# Altium PCB RobotCtrl_Base_Func.PcbDoc
Units mil, origin at the board's own origin, x right, y up, seen from the top; angles counter-clockwise.
Board outline 3937.01 x 3937.01 mil, 2 copper layers (Top Layer, Bottom Layer); 88 components, 151 nets, 416 pads, 115 vias.
Unrouted connection lines stored in the file: 1.
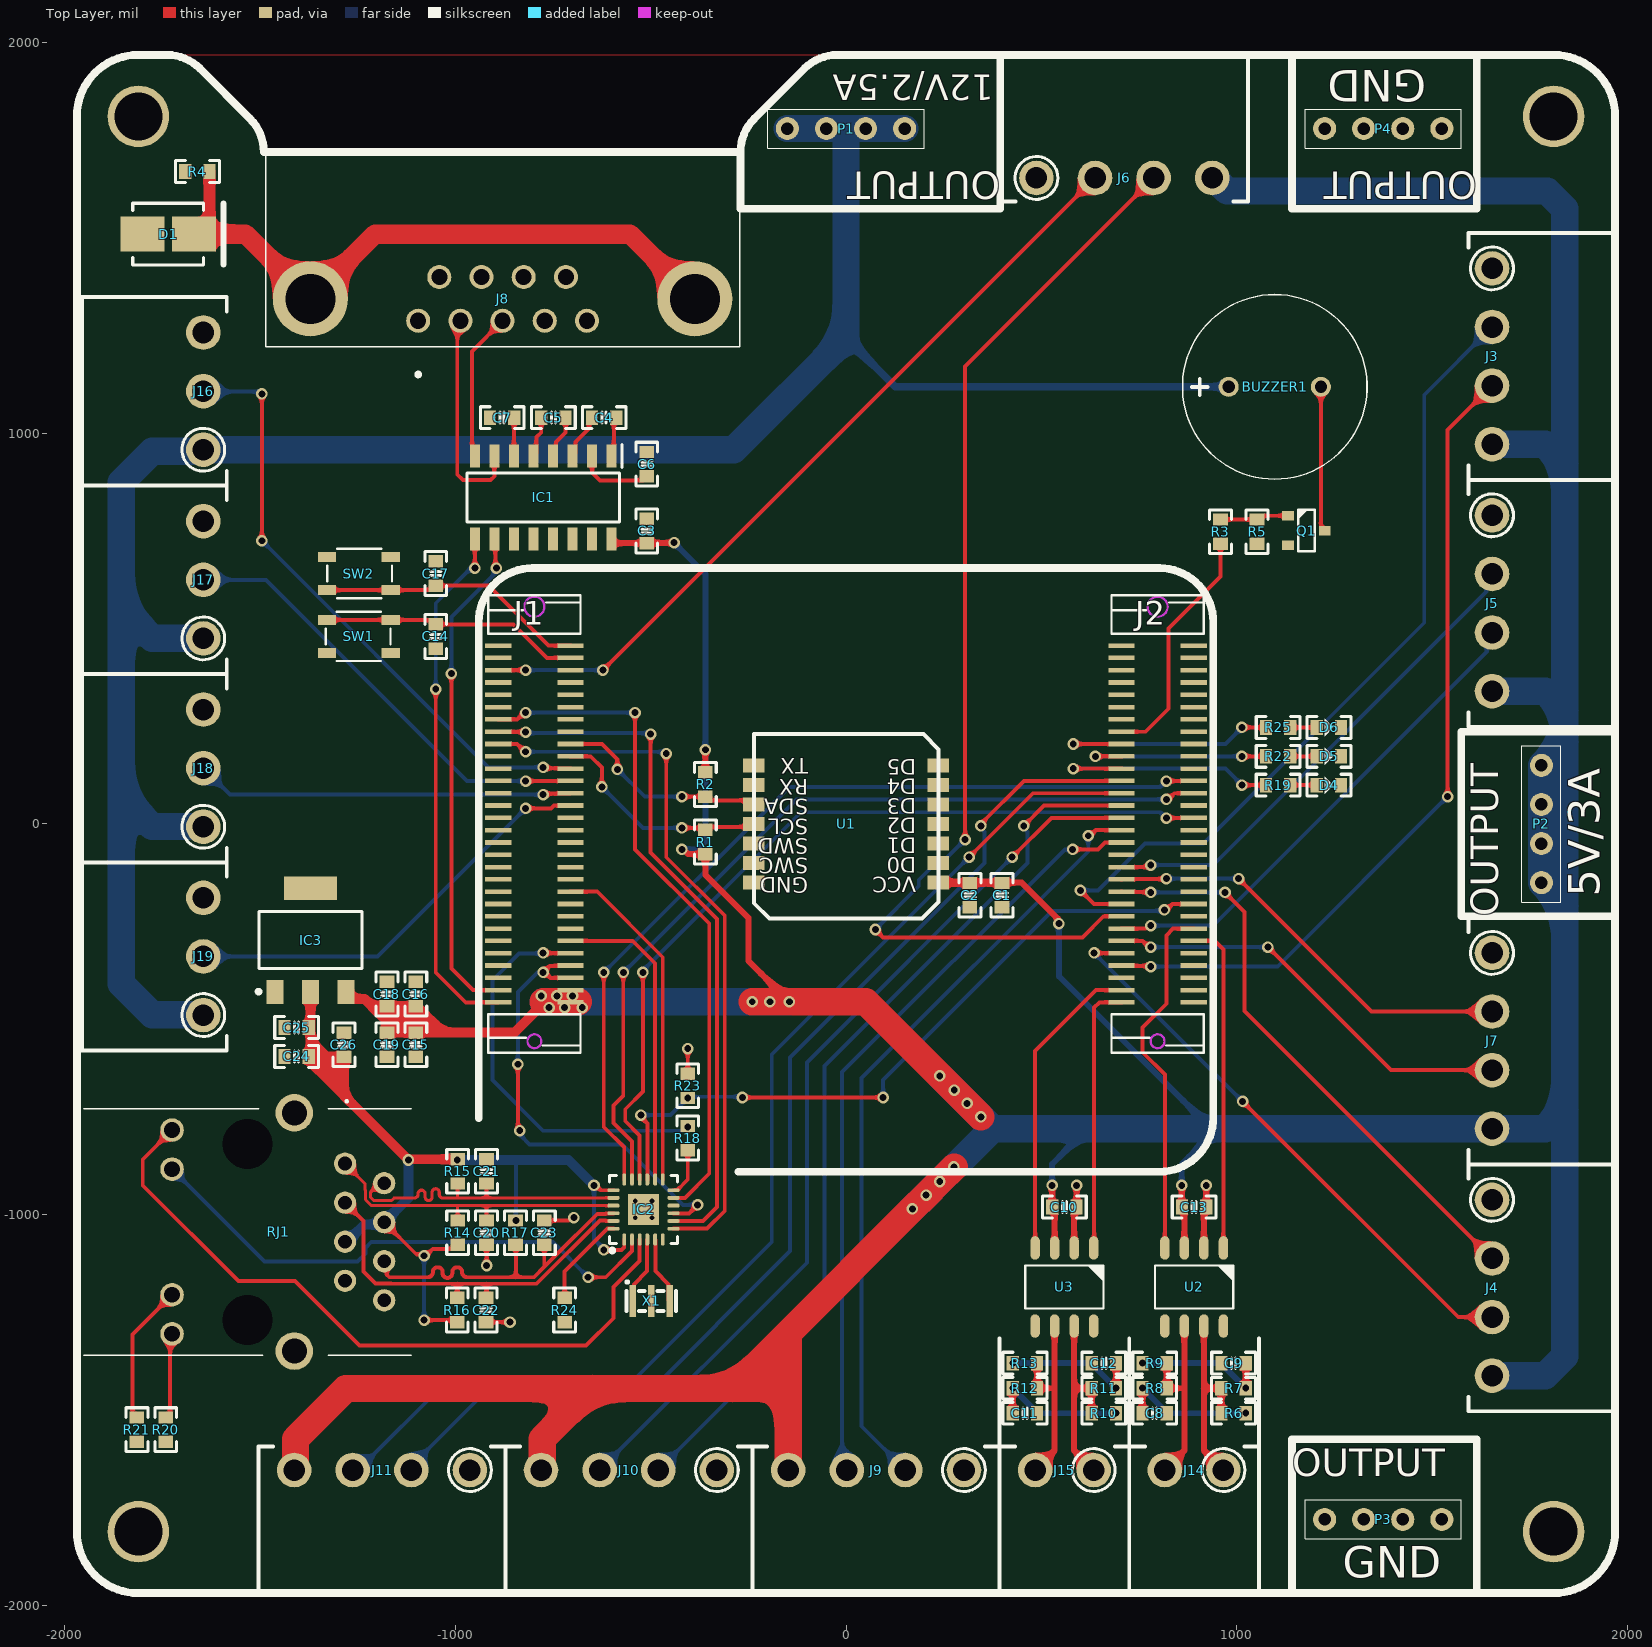
[diagram p0: Top Layer view]
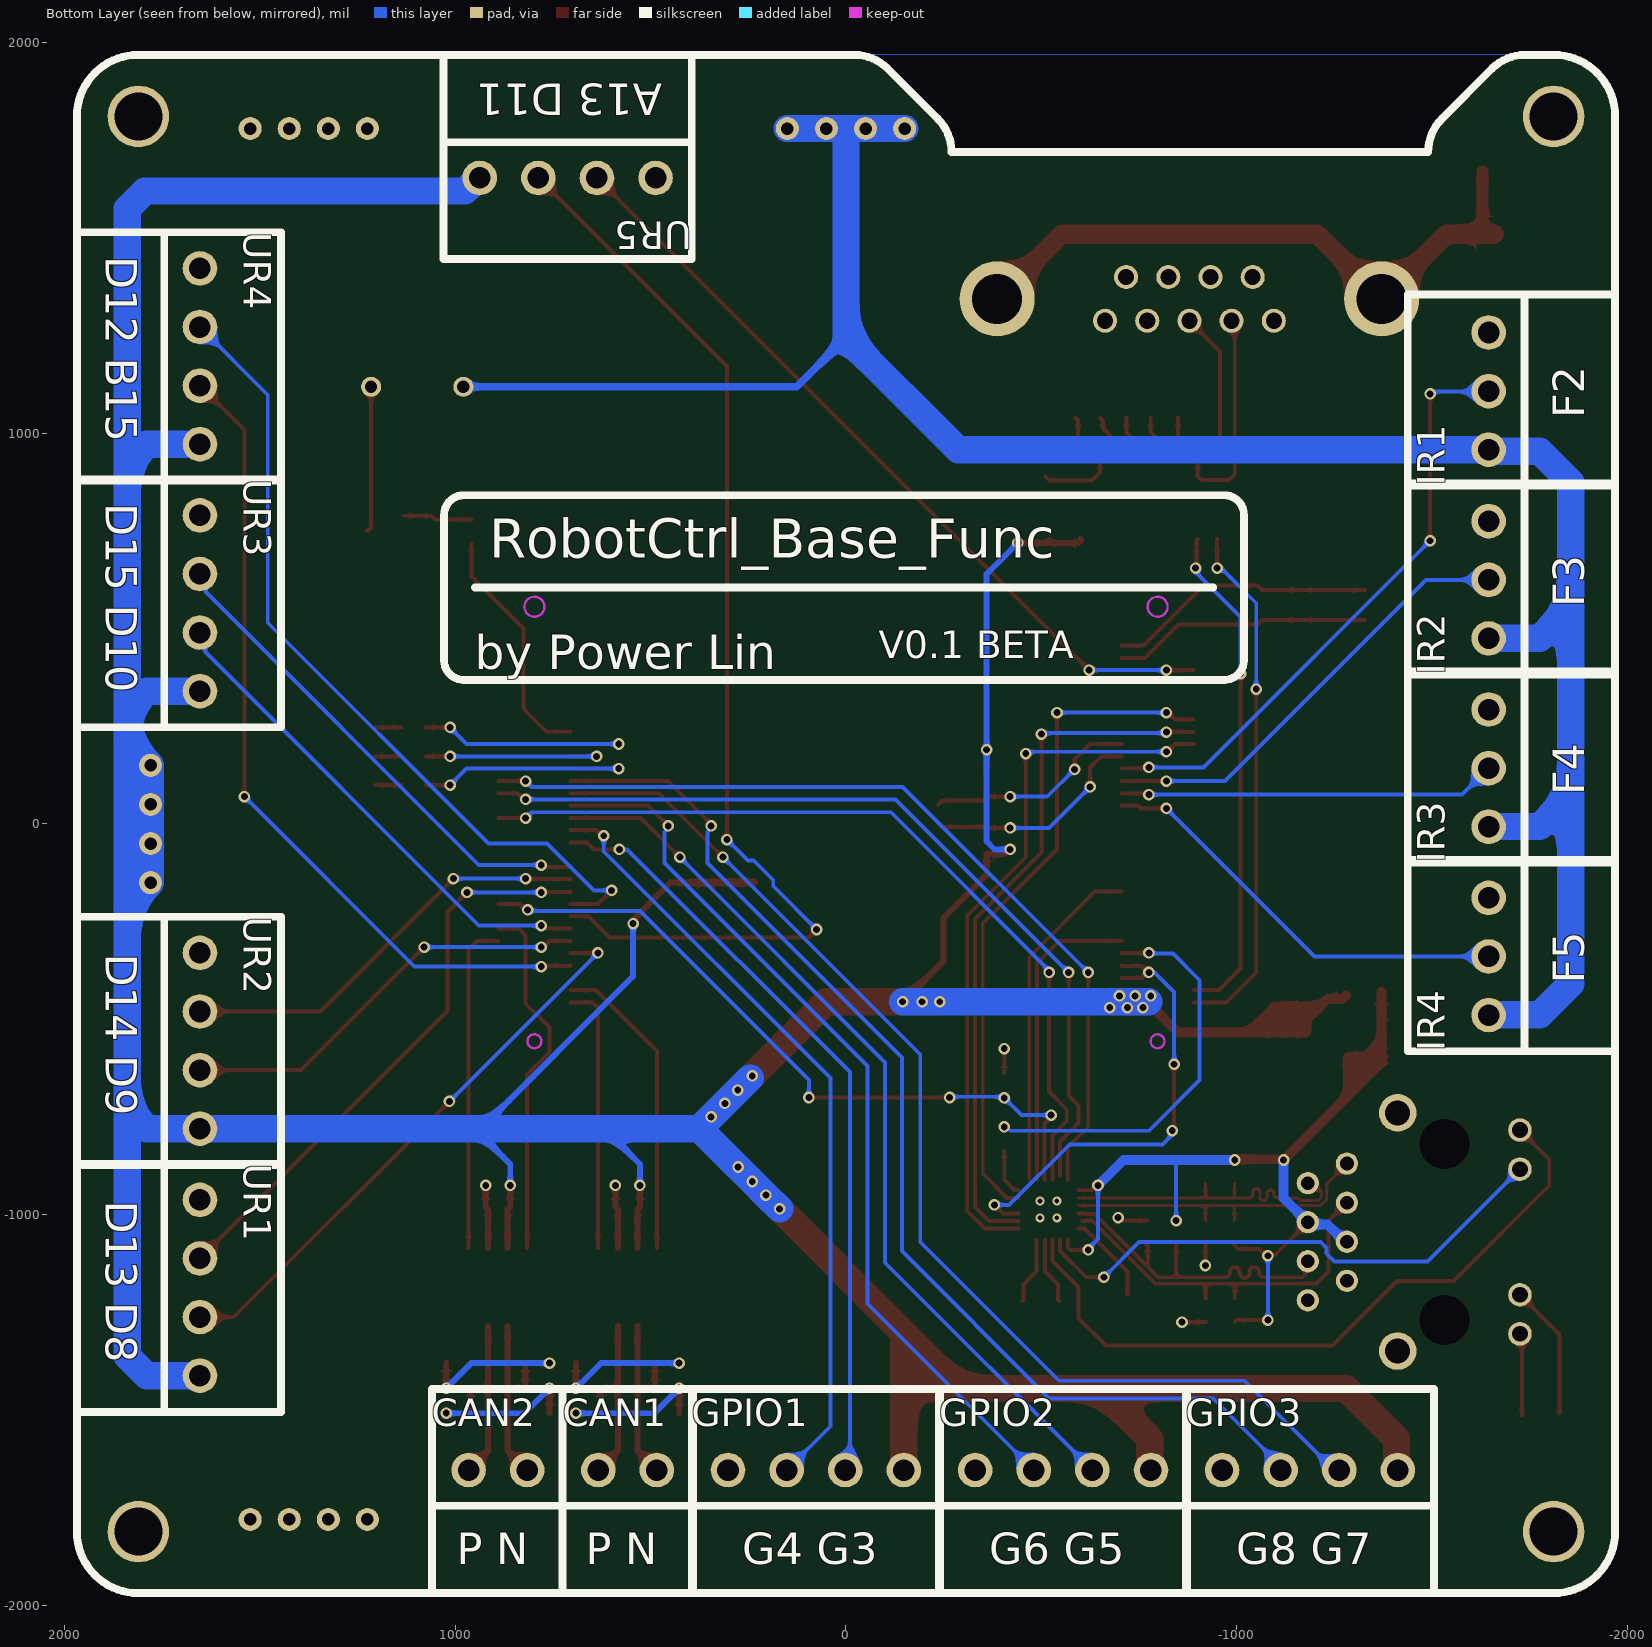
[diagram p1: Bottom Layer view, seen from below]
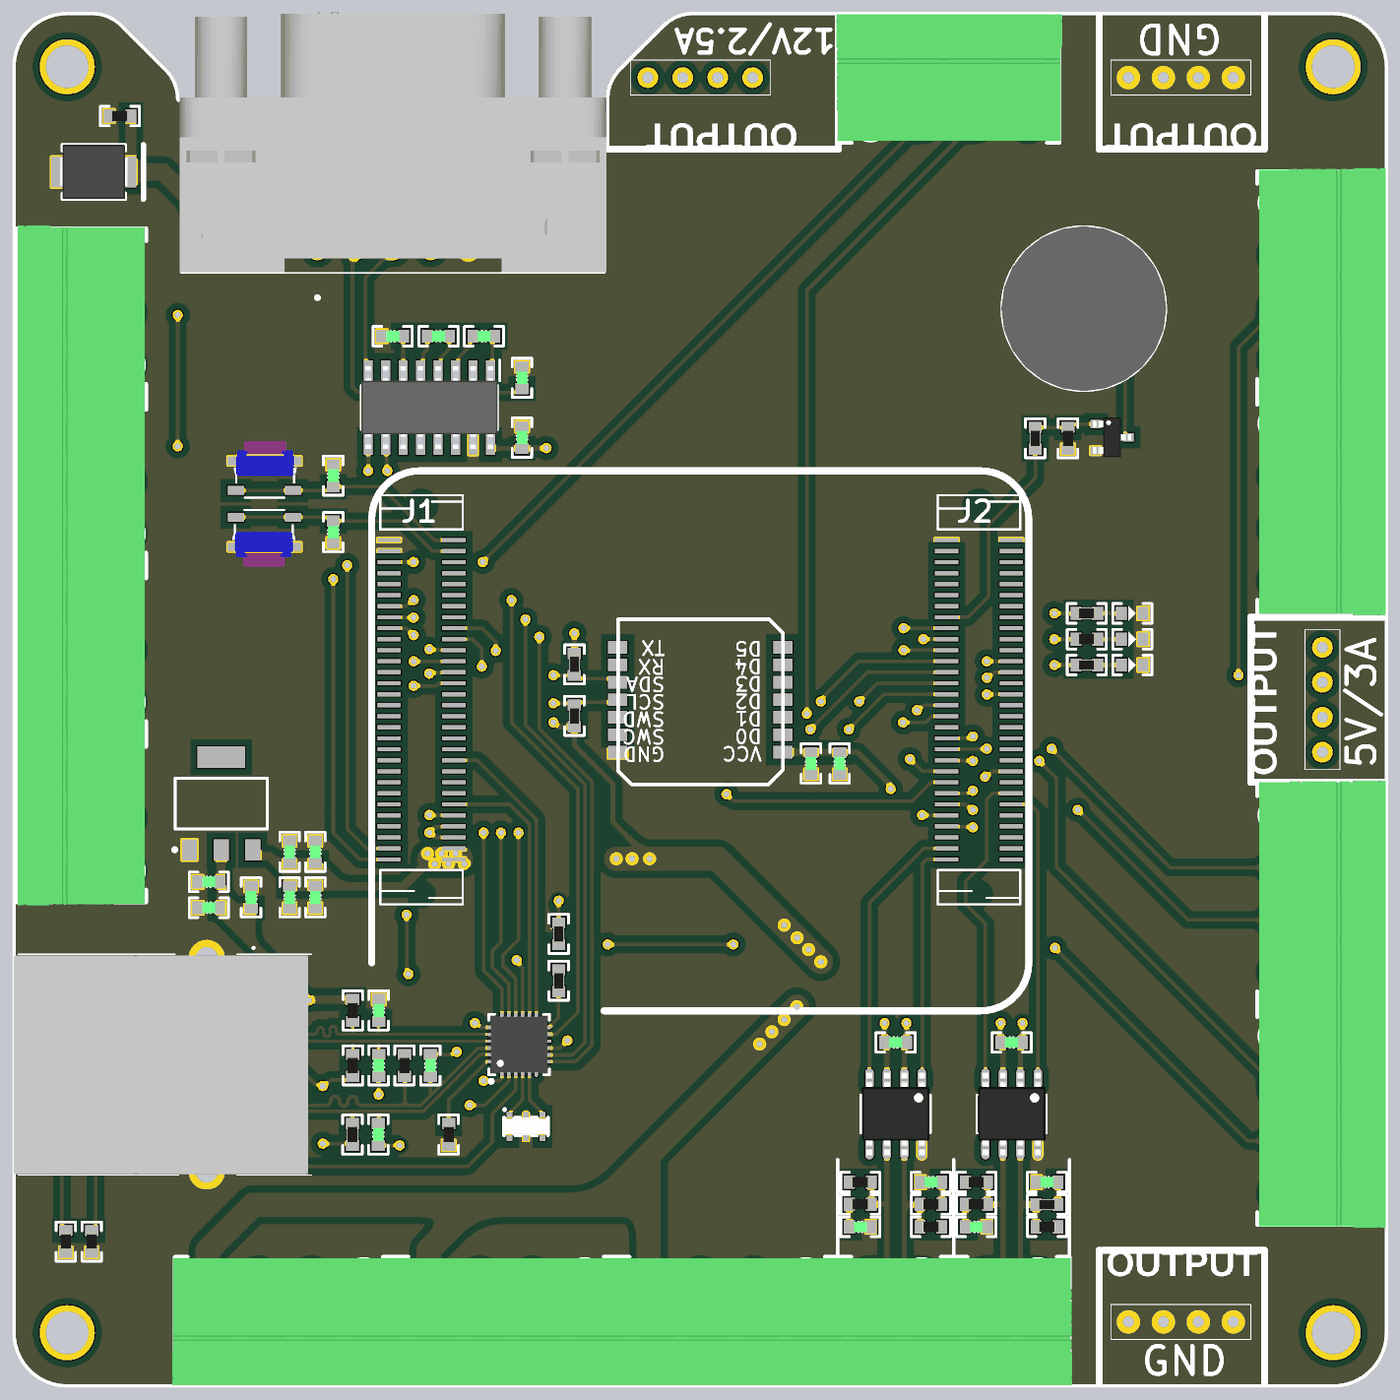
[diagram p2: 3D render of the assembled board from above, using the file's embedded part models]

## Layer stack, top to bottom
Top Solder: solder mask 0.4, Solder Resist, Dk 3.5
Top Layer: signal copper 1.4
Dielectric 1: dielectric 12.6, FR-4, Dk 4.8
Bottom Layer: signal copper 1.4
Bottom Solder: solder mask 0.4, Solder Resist, Dk 3.5

## Board outline
-1811.02,-1968.5 cw(c-1811.02,-1811.02) -1968.5,-1811.02 -1968.5,1811.02 cw(c-1811.02,1811.02) -1811.02,1968.5 -1738.5,1968.5 cw(c-1738.5,1847.79) -1653.15,1933.15 -1525.36,1805.36 cw(c-1610.71,1720) -1490,1720 -270,1720 cw(c-149.29,1720) -234.64,1805.36 -106.85,1933.15 cw(c-21.5,1847.79) -21.5,1968.5 1811.02,1968.5 cw(c1811.02,1811.02) 1968.5,1811.02 1968.5,-1811.02 cw(c1811.02,-1811.02) 1811.02,-1968.5

## Design rules (kind name [scope] priority, off if disabled: settings)
Clearance [All] p1: gap=20 ignorepadtopadclearanceinfootprint=FALSE except(0: Arc-Arc Arc-Track Arc-SMDPad Arc-Hole Track-Track Track-SMDPad Track-Hole SMDPad-SMDPad SMDPad-Hole THPad-Hole Via-Hole Fill-Hole Poly-Hole Region-Hole Text-Hole; 10: Arc-THPad Arc-Via Arc-Text Track-THPad Track-Via Track-Text SMDPad-THPad SMDPad-Via SMDPad-Text THPad-THPad THPad-Via THPad-Text Via-Via Via-Text Fill-Text Poly-Text Region-Text Text-Text)
DiffPairsRouting [All] p1: maxlimit=10 minlimit=5 mostfreqgap=10 toplayer_minwidth=8 toplayer_maxwidth=15 toplayer_prefwidth=15 bottomlayer_minwidth=8 bottomlayer_maxwidth=15 bottomlayer_prefwidth=15 maxuncoupledlength=500
PolygonConnect [All] p1: connectstyle=Direct reliefconductorwidth=10 reliefentries=4 polygonreliefangle="90 Angle" airgapwidth=10
RoutingVias [All] p1: holewidth=17.72 width=29.53 viastyle="Through Hole" minholewidth=17.72 minwidth=29.53 maxholewidth=17.72 maxwidth=29.53
SolderMaskExpansion [All] p1: expansion=4 istentingtop=FALSE
Width [All] p1: maxlimit=150 minlimit=10 preferedwidth=10
29 further rules are at their usual default settings.

## Classes and differential pairs
differential pair TD: +TD_P -TD_N
differential pair RD: +RD_P -RD_N
differential pair CAN2: +CAN2_P -CAN2_N
differential pair CAN1: +CAN1_P -CAN1_N

## Components (designator, comment, footprint, x,y, rotation, side; value= is the part's Value field where it differs from the comment)
BUZZER1 "TMB12A12" DIP,P=7.6mm 1095.5,1119 r0 top
C1 "10uF" CAP-0603 399,-182.2 r270 top
C2 "100nF" CAP-0603 317,-182.2 r270 top
C3 "100nF" CAP-0603 -510,750 r270 top
C4 "100nF" CAP-0603 -618.9,1040 r0 top
C5 "100nF" CAP-0603 -748.9,1040 r0 top
C6 "100nF" CAP-0603 -510,921.1 r270 top
C7 "100nF" CAP-0603 -880,1040 r0 top
C8 "47nF" CAP-0603 790,-1508 r0 top
C9 "47nF" CAP-0603 992.1,-1380 r180 top
C10 "100nF" CAP-0603 559,-980.5 r180 top
C11 "47nF" CAP-0603 458,-1508 r0 top
C12 "47nF" CAP-0603 660.1,-1380 r180 top
C13 "100nF" CAP-0603 891,-980.5 r180 top
C14 "100nF" CAP-0603 -1050,480 r90 top
C15 "10uF" CAP-0603 -1101.12,-565 r90 top
C16 "10uF" CAP-0603 -1101.12,-435.12 r270 top
C17 "100nF" CAP-0603 -1050,641.1 r270 top
C18 "100nF" CAP-0603 -1175,-435.12 r270 top
C19 "100nF" CAP-0603 -1175,-565 r90 top
C20 "10pF" CAP-0603 -920,-1046.1 r90 top
C21 "10pF" CAP-0603 -920,-888.9 r270 top
C22 "10pF" CAP-0603 -921.12,-1243.9 r90 top
C23 "10pF" CAP-0603 -772.23,-1046.1 r270 top
C24 "22nF" CAP-0603 -1406.1,-595 r0 top
C25 "100nF" CAP-0603 -1406.1,-521.12 r0 top
C26 "10uF" CAP-0603 -1285,-565 r270 top
D1 "SMBJ12CA" DO-214AA/SMB -1735,1510 r180 top
D4 "RED" LED-0603 1235.99,99.34 r0 top
D5 "RED" LED-0603 1235.99,173.23 r0 top
D6 "RED" LED-0603 1235.99,247.11 r0 top
IC1 "SP3232EEN-L/TR" SOIC-16_150mil -775,835.9 r270 top
IC2 "LAN8720A-CP-TR" QFN-24-4x4 -518.23,-986.55 r90 top
IC3 "AMS1117-3.3" SOT-223 -1346.55,-304.13 r0 top
J1 "3710M060037G3FT01" 3710M060037G3FT01 -890,-456.69 r180 top locked
J2 "3710M060037G3FT01" 3710M060037G3FT01 704.96,-456.69 r180 top locked
J3 "KF2EDGR-3.81-4P" "FCI 06-381-4PIN" 1783.54,1197 r270 top
J4 "KF2EDGR-3.81-4P" "FCI 06-381-4PIN" 1783.54,-1187 r270 top
J5 "KF2EDGR-3.81-4P" "FCI 06-381-4PIN" 1783.54,565 r270 top
J6 "KF2EDGR-3.81-4P" "FCI 06-381-4PIN" 712.4,1783.54 r0 top
J7 "KF2EDGR-3.81-4P" "FCI 06-381-4PIN" 1783.54,-554.92 r270 top
J8 "D-DMR009PF-D002" "Through Hole,P=2.77mm" -1095,1288.03 r180 top
J9 "KF2EDGR-3.81-4P" "FCI 06-381-4PIN" 77,-1783.5 r180 top
J10 "KF2EDGR-3.81-4P" "FCI 06-381-4PIN" -555.59,-1783.5 r180 top
J11 "KF2EDGR-3.81-4P" "FCI 06-381-4PIN" -1187.5,-1783.5 r180 top
J14 "KF2EDGR-3.81-2P" "FCI 06-381-2PIN" 891,-1653.5 r180 top
J15 "KF2EDGR-3.81-2P" "FCI 06-381-2PIN" 559,-1653.5 r180 top
J16 "KF2EDGR-3.81-3P" "FCI 06-381-3PIN" -1775,1108 r90 top
J17 "KF2EDGR-3.81-3P" "FCI 06-381-3PIN" -1775,625 r90 top
J18 "KF2EDGR-3.81-3P" "FCI 06-381-3PIN" -1775,143 r90 top
J19 "KF2EDGR-3.81-3P" "FCI 06-381-3PIN" -1775,-339 r90 top
P1 "HDR1x4_2.54" HDR1X4_2.54 150,1780 r270 top locked
P2 "HDR1x4_2.54" HDR1X4_2.54 1780,150 r0 top locked
P3 "HDR1x4_2.54" HDR1X4_2.54 1525,-1780 r270 top locked
P4 "HDR1x4_2.54" HDR1X4_2.54 1525,1780 r270 top locked
Q1 "S9013" SOT-23-3 1178.5,751 r180 top
R1 "4.7k" R-0603 -360,-46.1 r270 top
R2 "4.7k" R-0603 -360,101.1 r90 top
R3 "1k" R-0603 958.5,748.15 r90 top
R4 "10k" R-0603 -1660,1670 r0 top
R5 "10k" R-0603 1052,748.15 r90 top
R6 "60R" R-0603 992.1,-1508 r0 top
R7 "60R" R-0603 991.85,-1444.25 r180 top
R8 "60R" R-0603 790,-1444 r0 top
R9 "60R" R-0603 790,-1380 r180 top
R10 "60R" R-0603 660.1,-1508 r0 top
R11 "60R" R-0603 660.1,-1444 r180 top
R12 "60R" R-0603 458,-1444 r0 top
R13 "60R" R-0603 458,-1380 r180 top
R14 "49.9R" R-0603 -993.88,-1046.1 r270 top
R15 "49.9R" R-0603 -993.88,-888.9 r90 top
R16 "49.9R" R-0603 -995,-1243.9 r270 top
R17 "49.9R" R-0603 -846.12,-1046.1 r90 top
R18 "510R" R-0603 -405,-803.9 r90 top
R19 "4.7k" R-0603 1106.1,99.34 r180 top
R20 "510R" R-0603 -1741.12,-1550 r90 top
R21 "510R" R-0603 -1815,-1550 r90 top
R22 "4.7k" R-0603 1106.1,173.23 r180 top
R23 "10k" R-0603 -405,-670 r90 top
R24 "12k" R-0603 -720,-1243.9 r270 top
R25 "4.7k" R-0603 1106.1,247.11 r180 top
RJ1 "HR911105A" HR911105A -1282.09,-869.17 r90 top
SW1 "KEY" KEY-4P-4.2*3.4*2.5 -1246.69,480 r0 top
SW2 "KEY" KEY-4P-4.2*3.4*2.5 -1246.69,641.1 r180 top
U1 "WT931" WT931 0,0 r180 top
U2 "TJA1050" SOIC_8 891,-1185.02 r180 top
U3 "TJA1050" SOIC_8 559,-1185.02 r180 top
X1 "25MHz" SMD3213-3P -498.5,-1220.79 r0 top

## Footprints (in the part's own frame and the unit in brackets; to place one, negate y for a bottom-side part, rotate by r counter-clockwise, add the part's x,y. Pads: shape width x height; smd on the part's side, far side on the other; paste and mask are expansions set on the pad)
3710M060037G3FT01 [mm]
  rect 1.7x0.3 smd: 1(-4.7,0) 2(-4.7,-0.8) 3(-4.7,-1.6) 4(-4.7,-2.4) 5(-4.7,-3.2) 6(-4.7,-4) 7(-4.7,-4.8) 8(-4.7,-5.6) 9(-4.7,-6.4) 10(-4.7,-7.2) 11(-4.7,-8) 12(-4.7,-8.8) 13(-4.7,-9.6) 14(-4.7,-10.4) 15(-4.7,-11.2) 16(-4.7,-12) 17(-4.7,-12.8) 18(-4.7,-13.6) 19(-4.7,-14.4) 20(-4.7,-15.2) 21(-4.7,-16) 22(-4.7,-16.8) 23(-4.7,-17.6) 24(-4.7,-18.4) 25(-4.7,-19.2) 26(-4.7,-20) 27(-4.7,-20.8) 28(-4.7,-21.6) 29(-4.7,-22.4) 30(-4.7,-23.2) 31(0,-23.2) 32(0,-22.4) 33(0,-21.6) 34(0,-20.8) 35(0,-20) 36(0,-19.2) 37(0,-18.4) 38(0,-17.6) 39(0,-16.8) 40(0,-16) 41(0,-15.2) 42(0,-14.4) 43(0,-13.6) 44(0,-12.8) 45(0,-12) 46(0,-11.2) 47(0,-10.4) 48(0,-9.6) 49(0,-8.8) 50(0,-8) 51(0,-7.2) 52(0,-6.4) 53(0,-5.6) 54(0,-4.8) 55(0,-4) 56(0,-3.2) 57(0,-2.4) 58(0,-1.6) 59(0,-0.8) 60(0,0)
  Keep-Out Layer circle w0.152: c-2.35,2.525 r0.45
  Keep-Out Layer circle w0.152: c-2.35,-25.725 r0.65
  silkscreen extent -5.35,-26.47 0.65,3.27
CAP-0603 [mm]
  rect 0.8x0.96 smd: 1(-0.79,0) 2(0.79,0)
  silkscreen extent -1.42,-0.71 1.42,0.71, body extent -0.76,-0.39 0.76,0.39, height 0.9
DIP,P=7.6mm [mm]
  round 1.3 hole 0.8: 1(-2.952,0) 2(3.048,0)
  silkscreen extent -5.95,-6 6.04,6, body extent -5.95,-6 6.05,6, height 9.9
DO-214AA/SMB [mm]
  rect 2.85x2.25 smd: 1(1.675,0) 2(-1.675,0)
  silkscreen extent -3.6,-2 2.3,2, body extent -2.5,-1.97 2.5,1.97, height 2.44
"FCI 06-381-2PIN" [mm] "FCI Pluggable Terminal Block"
  round 2.25 hole 1.4: 1(-1.905,0) 2(1.905,0)
  silkscreen extent -4.22,-1.52 4.22,7.87, body extent -4.4,-1.4 4.4,7.8, height 7.6
"FCI 06-381-3PIN" [mm] "FCI Pluggable Terminal Block"
  round 2.25 hole 1.4: 1(-3.81,-3.302) 2(0,-3.302) 3(3.81,-3.302)
  silkscreen extent -6.12,-4.83 6.12,4.57, body extent -6.31,-4.7 6.31,4.5, height 7.6
"FCI 06-381-4PIN" [mm] "FCI Pluggable Terminal Block"
  round 2.25 hole 1.4: 1(-5.715,-3.302) 2(-1.905,-3.302) 3(1.905,-3.302) 4(5.715,-3.302)
  silkscreen extent -8.03,-4.83 8.03,4.57, body extent -8.21,-4.7 8.22,4.5, height 7.6
HDR1X4_2.54 [mm]
  round 1.5 hole 0.813: 1(0,0) 2(0,-2.54) 3(0,-5.08) 4(0,-7.62)
  silkscreen extent -1.27,-8.89 1.27,1.27
HR911105A [mm]
  round 1.446 hole 0.89: 1(0,0) 2(-1.27,-2.54) 3(-2.54,0) 4(-3.81,-2.54) 5(-5.08,0) 6(-6.35,-2.54) 7(-7.62,0) 8(-8.89,-2.54)
  round 1.53 hole 1.02: 9(2.18,11.25) 10(-0.36,11.25) 11(-8.53,11.25) 12(-11.07,11.25)
  round 2.445 hole 1.63: MH1(3.3,3.3) MH2(-12.19,3.3)
  round 1.625 hole 3.25 unplated: MH3(1.27,6.35) MH4(-10.16,6.35)
  silkscreen extent -12.46,-4.3 4.1,17, body extent -12.39,-4.08 3.49,17.32, height 13.53
KEY-4P-4.2*3.4*2.5 [mm] "SKRPABE010"
  rect 1.2x0.65 smd: 1(-2.075,1.075) 1(2.075,1.075) 2(-2.075,-1.075) 2(2.075,-1.075)
  silkscreen extent -2.15,-1.6 2.05,1.6, body extent -2.35,-1.6 2.25,1.6, height 2.5
LED-0603 [mm]
  rect 0.8x0.96 smd: 1(-0.79,0) 2(0.79,0)
  silkscreen extent -1.42,-0.71 1.42,0.71, body extent -0.81,-0.4 0.81,0.4, height 0.6
QFN-24-4x4 [mm] "QFN, 24-Leads, Body 4.00x4.00mm, Pitch 0.50mm, Thermal Pad 2.70x2.60mm, IPC Medium Density"
  oval 0.8x0.25 smd: 1(-1.95,1.25) 2(-1.95,0.75) 3(-1.95,0.25) 4(-1.95,-0.25) 5(-1.95,-0.75) 6(-1.95,-1.25) 13(1.95,-1.25) 14(1.95,-0.75) 15(1.95,-0.25) 16(1.95,0.25) 17(1.95,0.75) 18(1.95,1.25)
  oval 0.25x0.8 smd: 7(-1.25,-1.95) 8(-0.75,-1.95) 9(-0.25,-1.95) 10(0.25,-1.95) 11(0.75,-1.95) 12(1.25,-1.95) 19(1.25,1.95) 20(0.75,1.95) 21(0.25,1.95) 22(-0.25,1.95) 23(-0.75,1.95) 24(-1.25,1.95)
  rect 2x2 smd: 25(0,0)
  silkscreen extent -2.79,-2.2 2.2,2.2, body extent -2.07,-2.07 2.07,2.07, height 0.9
R-0603 [mm]
  rect 0.8x0.96 smd: 1(-0.79,0) 2(0.79,0)
  silkscreen extent -1.42,-0.71 1.42,0.71, body extent -0.76,-0.38 0.76,0.38, height 0.41
SMD3213-3P [mm]
  rect 0.4x2.1 smd: 1(-1.2,0) 2(0,0) 3(1.2,0)
  silkscreen extent -1.6,-0.65 1.6,1.27, body extent -1.6,-0.65 1.6,0.65, height 0.7
SOIC-16_150mil [mm]
  rect 1.5x0.65 smd: 1(-2.7,4.445) 2(-2.7,3.175) 3(-2.7,1.905) 4(-2.7,0.635) 5(-2.7,-0.635) 6(-2.7,-1.905) 7(-2.7,-3.175) 8(-2.7,-4.445) 9(2.7,-4.445) 10(2.7,-3.175) 11(2.7,-1.905) 12(2.7,-0.635) 13(2.7,0.635) 14(2.7,1.905) 15(2.7,3.175) 16(2.7,4.445)
  silkscreen extent -3.45,-4.95 1.6,5.12, body extent -3,-4.95 3,4.95, height 1.75
SOIC_8 [mil]
  oval 24x60 smd: 1(-75,-100.02) 2(-25,-100.02) 3(25,-100.02) 4(75,-100.02) 5(75,99.98) 6(25,99.98) 7(-25,99.98) 8(-75,99.98)
  silkscreen extent -100,-55 100,55, body extent -96,-118 96,118, height 69
SOT-23-3 [mil]
  rect 30x24 smd: 1(47,-38) 2(47,38) 3(-47,0)
  silkscreen extent -21,-53 21,53, body extent -55,-57 55,57, height 51
SOT-223 [mm]
  rect 1.1x1.55 smd: 1(-2.91,-3.197) 2(-0.61,-3.197) 3(1.69,-3.197)
  rect 3.45x1.55 smd: 4(-0.61,3.553)
  silkscreen extent -4.11,-3.3 2.74,2.03, body extent -3.88,-3.38 2.62,3.58, height 1.7
"Through Hole,P=2.77mm" [mil]
  round 61.46 hole 40.98: 1(0,0) 2(-107.99,0) 3(-215.98,0) 4(-323.98,0) 5(-431.97,0) 6(-54.02,-111.97) 7(-162.01,-111.97) 8(-270,-111.97) 9(-377.99,-111.97)
  round 192.01 hole 128: MH1(-707.99,-55.98) MH2(276.02,-55.98)
  silkscreen extent -822,-430 391,141, body extent -826,-679 394,65, height 477
WT931 [mm]
  rect 1.4x0.9 smd: 1(-6,3.81) 2(-6,-2.54) 3(-6,-1.27) 4(-6,0) 5(-6,1.27) 5(-6,-3.81) 6(-6,2.54) 8(6,3.81) 9(6,2.54) 10(6,1.27) 11(6,0) 12(6,-1.27) 13(6,-2.54) 14(6,-3.81)
  silkscreen extent -6.03,-5.85 5.97,6.15, body extent -5.98,-5.87 5.95,6.07, height 1.5

## Part data
BUZZER1: library part BUZZER, "TMB12A12 有源蜂鸣器"
C1 C2 C3 C4 C5 C6 C7 C8 C9 C10 C11 C12 C13 C14 C15 C16 C17 C18 C19 C20 C21 C22 C23 C24 C25 C26: library part CAP, "贴片电容", Package=0402, SuppliersPartNumber=C52923, ComponentLink1Description=供应商链接, ComponentLink1URL=http://www.szlcsc.com/product/details_53938.html, Supplier=LC
D1: library part TVS_C
D4 D5 D6: library part LED, "发光二极管", Package=0603, SuppliersPartNumber=C2290, ComponentLink1Description=供应商链接, ComponentLink1URL=http://www.szlcsc.com/product/details_2663.html, Supplier=LC
IC1: library part SP3232EEN, "RS232 芯片", Manufacturer_Name=MaxLinear, Mouser Part Number=701-SP3232EEN-L/TR, Arrow Part Number=SP3232EEN-L/TR, Arrow Price/Stock=https://www.arrow.com/en/products/sp3232een-ltr/maxlinear-inc, Datasheet Link=https://www.maxlinear.com/ds/sp3222e_sp3232e.pdf, Height=1.75mm, Manufacturer_Part_Number=SP3232EEN-L/TR, Mouser Price/Stock=https://www.mouser.co.uk/ProductDetail/MaxLinear/SP3232EEN-L-TR?qs=Hy8V1%2FADhVKNh9v9NvoeCw%3D%3D
IC2: "Integrated Circuit", Manufacturer_Name=Microchip, Mouser Part Number=886-LAN8720A-CP-TR, Arrow Part Number=LAN8720A-CP-TR, Arrow Price/Stock=https://www.arrow.com/en/products/lan8720a-cp-tr/microchip-technology?region=nac, Datasheet Link=https://componentsearchengine.com/Datasheets/1/LAN8720A-CP-TR.pdf, Height=1mm, Manufacturer_Part_Number=LAN8720A-CP-TR, Mouser Price/Stock=https://www.mouser.co.uk/ProductDetail/Microchip-Technology/LAN8720A-CP-TR?qs=pA5MXup5wxG3QiSvrqf%2FHQ%3D%3D
IC3: library part AMS1117, "AMS1117-3.3 1.0A", Manufacturer_Name=Nexperia, Manufacturer_Part_Number=SI2302DS, Mouser Part Number=N/A, RS Part Number=7983053P, Datasheet Link=https://assets.nexperia.com/documents/data-sheet/SI2302DS.pdf, Height=1.1mm, Mouser Price/Stock=https://www.mouser.com/Search/Refine.aspx?Keyword=N%2FA, RS Price/Stock=http://uk.rs-online.com/web/p/products/7983053P
J1 J2: library part 3710M/F, "B2B Connector"
J3 J4 J5 J6 J7 J9 J10 J11: "TERM BLOCK HDR 4POS 90DEG 3.81MM", Color=Green, Current - UL=10A, Manufacturer="Amphenol Anytek", Manufacturer Part Number=OQ0432510000G, Operating Temperature="-40°C ~ 115°C", Voltage - UL=300V, Component Type=接线端子, ComponentLink1Description=Datasheet, ComponentLink1URL=http://portal.fciconnect.com/Comergent//fci/drawing/oqxx32x100j0g.pdf, Contact Mating Finish=Tin, Header Orientation="90°, Right Angle", LastUpdated="2019-12-16 19:15:03.463", Lifecycle Status=0, Minimum Order=1, Mounting Type="Through Hole", Number of Levels=1, Number of Positions=4, Packaging=Bulk, Part Number=OQ0432510000G, Part Status=Active, Pitch="0.150\" (3.81mm)", Positions Per Level=4, Price=0.71, Series=06-381, Termination Style=Solder, Type="Header, Male Pins, Shrouded (4 Side)"
J8: library part DB9, "D-Sub 连接器", Arrow Part Number=5747844-5, Manufacturer_Name="TE Connectivity", Mouser Part Number=571-5747844-5, Arrow Price/Stock=https://www.arrow.com/en/products/5747844-5/te-connectivity, Datasheet Link=http://www.te.com/commerce/DocumentDelivery/DDEController?Action=srchrtrv&DocNm=82068_AMPLIMITE_Right-Angle_Posted_Conn&DocType=Catalog+Section&DocLang=English&PartCntxt=, Height=12.9286mm, Manufacturer_Part_Number=5747844-5, Mouser Price/Stock=https://www.mouser.co.uk/ProductDetail/TE-Connectivity/5747844-5?qs=x6EjVpvqMVPrkQsJHUlJGw%3D%3D
J14 J15: "TERM BLOCK HDR 2POS 90DEG 3.81MM", Color=Green, Current - UL=10A, Manufacturer="Amphenol Anytek", Manufacturer Part Number=OQ0232510000G, Operating Temperature="-40°C ~ 115°C", Voltage - UL=300V, Component Type=接线端子, ComponentLink1Description=Datasheet, ComponentLink1URL=http://portal.fciconnect.com/Comergent//fci/drawing/oqxx32x100j0g.pdf, Contact Mating Finish=Tin, Header Orientation="90°, Right Angle", LastUpdated="2019-12-16 19:14:30.110", Lifecycle Status=0, Minimum Order=1, Mounting Type="Through Hole", Number of Levels=1, Number of Positions=2, Packaging=Bulk, Part Number=OQ0232510000G, Part Status=Active, Pitch="0.150\" (3.81mm)", Positions Per Level=2, Price=0.49, Series=06-381, Termination Style=Solder, Type="Header, Male Pins, Shrouded (4 Side)"
J16 J17 J18 J19: "TERM BLOCK HDR 3POS 90DEG 3.81MM", Color=Green, Current - UL=10A, Manufacturer="Amphenol Anytek", Manufacturer Part Number=OQ0332510000G, Operating Temperature="-40°C ~ 115°C", Voltage - UL=300V, Component Type=接线端子, ComponentLink1Description=Datasheet, ComponentLink1URL=http://portal.fciconnect.com/Comergent//fci/drawing/oqxx32x100j0g.pdf, Contact Mating Finish=Tin, Header Orientation="90°, Right Angle", LastUpdated="2019-12-16 19:14:45.877", Lifecycle Status=0, Minimum Order=1, Mounting Type="Through Hole", Number of Levels=1, Number of Positions=3, Packaging=Bulk, Part Number=OQ0332510000G, Part Status=Active, Pitch="0.150\" (3.81mm)", Positions Per Level=3, Price=0.53, Series=06-381, Termination Style=Solder, Type="Header, Male Pins, Shrouded (4 Side)"
P1 P2 P3 P4: "Header"
Q1: library part BJT_NPN
R1 R2 R3 R4 R5 R6 R7 R8 R9 R10 R11 R12 R13 R14 R15 R16 R17 R18 R19 R20 R21 R22 R23 R24 R25: library part RES, "贴片电阻", Package=0805, SuppliersPartNumber=C17798, Supplier=LC
RJ1: library part RJ45_LED, "内置变压器的RJ45"
SW1 SW2: "按键开关"
U1: "陀螺仪模组"
U2 U3: "CAN 控制器（5V）"
X1: library part XTAL, "CSTCE25M00G51-R0"

## Free pads (board coordinates)
  round 157.48 hole 122.05: 2(-1811.02,-1811.02) 2(-1811.02,1811.02) 2(1811.02,-1811.02) 2(1811.02,1811.02)

## Via types
v1: diameter 29.53, hole 17.72, Top Layer to Bottom Layer, 111 vias
v2: diameter 23.86, hole 11.81, Top Layer to Bottom Layer, 4 vias

## Nets (pads, with @x,y where several pads share a name; then routed paths per layer and width w, separated by ;. In a path a pad name is that pad's centre, name@x,y a point inside that pad or via, vN(x,y) a via of type N, cw(c..) or ccw(c..) an arc to the next point about the centre after c; other vN are vias at no path point)
CAN1_N: J14.2 R8.2 R9.1 U2.6 | length 498.2
  Top Layer w15: J14.2 866,-1603.5 866,-1444.25 ; R9.1 R8.2 865.75,-1444 866,-1444.25 ; U2.6 866,-1444.25
CAN1_P: J14.1 R6.1 R7.2 U2.7 | length 498
  Top Layer w15: 916,-1444.25 R7.2 ; U2.7 916,-1603.5 J14.1 ; R6.1 R7.2@961,-1444
CAN2_N: J15.2 R12.2 R13.1 U3.6 | length 498.2
  Top Layer w15: J15.2 534,-1603.5 534,-1444.25 ; R13.1 R12.2 533.75,-1444 534,-1444.25 ; U3.6 534,-1444.25
CAN2_P: J15.1 R10.1 R11.2 U3.7 | length 498
  Top Layer w15: 584,-1444.25 R11.2@628.75,-1444.25 ; U3.7 584,-1603.5 J15.1 ; R10.1 R11.2
GND: C1.2 C2.2 C3.1 C6.1 C7.1 C8.2 C9.2 C10.1 C11.2 C12.2 C13.1 C14.1 C15.1 C16.1 C17.1 C18.1 C19.1 C20.1 C21.1 C22.1 C23.1 C24.1 C25.1 C26.1 D1.1 D4.2 D5.2 D6.2 IC1.15 IC2.25 IC3.1 J1.31 J1.32 J2.30 J2.31 J3.1 J4.1 J5.1 J6.1 J7.1 J8.5 J9.1 J10.1 J11.1 J16.3 J17.3 J18.3 J19.3 P3.1 P3.2 P3.3 P3.4 P4.1 P4.2 P4.3 P4.4 Q1.2 R4.1 R5.1 R20.1 R21.1 R23.2 R24.2 RJ1.7 RJ1.8 RJ1.MH1 RJ1.MH2 RJ1.MH3 RJ1.MH4 SW1.2 SW2.2 U1.8 U2.2 U2.8 U3.2 U3.8 X1.2 | length 582.4
  Top Layer w10: C22.1 v1(-860,-1275) ; v1(-920,-1130) C20.1 ; C23.1 -709.55,-1015 -701.86,-1007.31 v1(-696.58,-1007.31) ; R23.2 v1(-405,-575)
  Top Layer w15: U3.2 584,-986.6 C10.1 ; v1(590,-925) 590.05,-925.05 590.05,-980.45 C10.1 ; C10.1@590.35,-980.25 C10.1 ; U2.2 916,-986.6 C13.1@922.35,-980.25 ; v1(922,-925) 922.05,-925.05 C13.1@922.05,-980.45
  other v2: -539.88,-1008.2 -496.57,-1008.2 -539.88,-964.9 -496.57,-964.9
LED_LINK: IC2.3 RJ1.9 | length 1805.9
  Top Layer w10: RJ1.9 -1800,-858.35 -1800,-925 -1555,-1170 -1410,-1170 -1245,-1335 -665,-1335 -595,-1265 -595,-1185 -528.07,-1118.07 IC2.3
LED_SPEED: IC2.2 RJ1.10 | length 1399.3
  Top Layer w10: v1(-660,-1160) -615,-1160 -547.76,-1092.76 IC2.2
  Bottom Layer w10: RJ1.10 -1488.35,-1120 -1250,-1120 -1230,-1100 -1230,-1085 -1215,-1070 -1045,-1070 -990,-1070 -750,-1070 v1(-660,-1160)
NetBUZZER1_2: BUZZER1.2 Q1.3 | length 373.9
  Top Layer w10: BUZZER1.2 1215.5,758 1222.5,751 Q1.3
NetC4_1: C4.1 IC1.3 | length 118.5
  Top Layer w10: IC1.3 -692.2,949.99 -692.2,977.8 -657.93,1012.07 -657.93,1032.07 C4.1
NetC4_2: C4.2 IC1.1 | length 102.9
  Top Layer w10: IC1.1 -594.26,947.94 -594.26,1033.53 C4.2
NetC5_1: C5.1 IC1.5 | length 106.1
  Top Layer w10: IC1.5 -792.53,949.67 -792.53,989.99 -780,1002.52 C5.1
NetC5_2: C5.2 IC1.4 | length 111.1
  Top Layer w10: IC1.4 -742.2,949.99 -742.2,977.8 -717.8,1002.2 C5.2
NetC6_2: C6.2 IC1.2 | length 195.2
  Top Layer w10: IC1.2 -650,900 -629.25,879.25 -520.75,879.25 C6.2
NetC7_2: C7.2 IC1.6 | length 98.3
  Top Layer w10: IC1.6 -850,1038.9 C7.2
NetC8_1: C8.1 R6.2 R8.1 | length 354.8
  Top Layer w15: C8.1 v1(758.9,-1444)
  Bottom Layer w15: v1(758.9,-1444) 822.9,-1508 v1(1023.2,-1508)
NetC9_1: C9.1 R7.1 R9.2 | length 354.8
  Top Layer w15: v1(1023.2,-1444) C9.1
  Bottom Layer w15: v1(758.9,-1380) 959.2,-1380 v1(1023.2,-1444)
NetC11_1: C11.1 R10.2 R12.1 | length 354.8
  Top Layer w15: C11.1 v1(426.9,-1444)
  Bottom Layer w15: v1(426.9,-1444) 490.9,-1508 v1(691.2,-1508)
NetC12_1: C12.1 R11.1 R13.2 | length 354.8
  Top Layer w15: v1(691.2,-1444) C12.1
  Bottom Layer w15: v1(426.9,-1380) 627.2,-1380 v1(691.2,-1444)
NetD1_2: D1.2 J8.MH1 J8.MH2 R4.2 | length 1660.4
  Top Layer w30: D1.2 -1658.19,1510 -1628.9,1539.29 R4.2
  Top Layer w50: D1.2@-1658.19,1510 -1537.01,1510 J8.MH2 -1205.04,1510 -552.99,1510 J8.MH1
NetD4_A: D4.1 R19.1 | length 67.7
  Top Layer w10: R19.1 D4.1
NetD5_A: D5.1 R22.1 | length 67.7
  Top Layer w10: R22.1 D5.1
NetD6_A: D6.1 R25.1 | length 67.7
  Top Layer w10: R25.1 D6.1
NetIC2_4: IC2.4 X1.1 | length 172
  Top Layer w10: X1.1 -542.87,-1217.91 -542.87,-1178.45 -508.92,-1144.5 IC2.4@-508.92,-1064.04
NetIC2_5: IC2.5 X1.3 | length 172
  Top Layer w10: IC2.5@-488.07,-1064.04 -488.07,-1144.5 -454.13,-1178.45 -454.13,-1217.91 X1.3
NetIC2_12: IC2.12 R18.1 | length 123.7
  Top Layer w10: IC2.12 -430.79,-937.34 -430.71,-937.26 -430.71,-936.07 -405,-910.36 R18.1
NetIC2_24: IC2.24 R24.1 | length 229.1
  Top Layer w10: R24.1@-720,-1203.9 -720,-1145 -610.76,-1035.76 IC2.24
NetQ1_1: Q1.1 R3.2 R5.2 | length 177
  Top Layer w10: R3.2 R5.2 1061.75,789 Q1.1
NetR20_2: R20.2 RJ1.12 | length 211
  Top Layer w10: R20.2@-1730,-1513.91 -1730,-1310 RJ1.12
NetR21_2: R21.2 RJ1.11 | length 343.9
  Top Layer w10: R21.2@-1826.1,-1507.05 -1826.1,-1306.1 RJ1.11
PA0: J1.7
PA1: IC2.14 J1.6 | length 793.4
  Top Layer w10: J1.6 -545.79,-299.21 -488.7,-356.3 IC2.14
PA2: J1.5 R18.2 | length 1044.5
  Top Layer w10: v1(-775,-330) -774.65,-330.35 -705.31,-330.35 J1.5 ; v1(-405,-775) R18.2
  Bottom Layer w10: v1(-775,-330) -776.48,-331.48 -836.48,-331.48 -905,-400 -905,-655 -775,-785 -420.28,-785 -410.28,-775 v1(-405,-775)
PA3: J1.33 J6.2 | length 2048.8
  Top Layer w10: J1.33@-889.7,394 v1(-820,394) ; v1(-622.14,394) J6.2
  Bottom Layer w10: v1(-820,394) v1(-622.14,394)
PA4: J1.34
PA5: J1.35
PA6: J1.36
PA7: IC2.11 J1.37 | length 1733
  Top Layer w10: J1.37 -841.54,267.72 -824.25,285 v1(-820,285) ; v1(-540,285) -540,-65 -350,-255 -350,-895 -412.02,-957.02 IC2.11
  Bottom Layer w10: v1(-820,285) v1(-540,285)
PA8: J2.37
PA9: J2.36
PA10: J2.35
PA11: J2.34
PA12: J2.33
PA13: J2.32
PA14: J2.1
PA15: J2.2
PB0: J1.40
PB1: J1.41
PB2: J1.42
PB3: J2.21
PB4: J2.22
PB5: J2.23
PB6: J2.24
PB7: J2.25
PB8: J2.26
PB9: J2.27
PB10: IC1.10 J1.59 | length 1292.2
  Top Layer w10: v1(-1010,385) -1010,-370 -954.8,-425.2 J1.59 ; IC1.10 -897.5,727.1 -897.5,657.5 v1(-895,655)
  Bottom Layer w10: v1(-1010,385) -1010,530 -898.74,641.26 -898.74,651.26 v1(-895,655)
PB11: IC1.9 J1.60 | length 1349.4
  Top Layer w10: v1(-1050,345) -1050,-380 -973.31,-456.69 -891.81,-456.69 -890.91,-457.6 J1.60 ; v1(-950,655) IC1.9
  Bottom Layer w10: v1(-1050,345) -1050,565 -963.74,651.26 -953.74,651.26 v1(-950,655)
PB12: J2.60 U3.1 | length 690.9
  Top Layer w10: U3.1 635,-1084 635,-470 648.31,-456.69 J2.60
PB13: J2.59 U3.4 | length 789.5
  Top Layer w10: U3.4 484,-581 639.8,-425.2 J2.59
PB14: J2.58
PB15: J2.57 J3.3 | length 2115.4
  Top Layer w10: J2.57 705.87,-363.11 778.11,-363.11 v1(780,-365) ; v1(1540,70) 1540,1008.46 J3.3
  Bottom Layer w10: v1(780,-365) 1105,-365 v1(1540,70)
PC0: J1.11
PC1: IC2.13 J1.10 | length 874.2
  Top Layer w10: J1.10 -636.77,-173.23 -469.02,-340.98 IC2.13
PC2: J1.9
PC3: J1.8
PC4: IC2.8 J1.38 | length 1799.4
  Top Layer w10: J1.38 -889.39,235.61 -820.61,235.61 v1(-820,235) ; v1(-500,230) -500,-72.84 -330,-242.84 -330,-980 -366.08,-1016.08 IC2.8
  Bottom Layer w10: v1(-820,235) -817.5,232.5 -502.5,232.5 v1(-500,230)
PC5: IC2.7 J1.39 | length 1822.5
  Top Layer w10: J1.39 -841.54,204.72 -821.81,185 v1(-820,185) ; v1(-460,180) -460,-85 -310.31,-234.68 -310.31,-990.32 -355.76,-1035.76 IC2.7
  Bottom Layer w10: v1(-820,185) -470.28,185 -465.28,180 v1(-460,180)
PC6: J2.41 R19.2 | length 634.1
  Top Layer w10: v1(581.73,141.73) J2.41 ; v1(1013.23,99.34) R19.2
  Bottom Layer w10: v1(581.73,141.73) 970.84,141.73 v1(1013.23,99.34)
PC7: J2.40 R22.2 | length 503.6
  Top Layer w10: v1(638.2,173.23) J2.40 ; v1(1013.23,173.23) R22.2
  Bottom Layer w10: v1(638.2,173.23) v1(1013.23,173.23)
PC8: J2.39 R25.2 | length 634.1
  Top Layer w10: v1(581.73,204.72) J2.39 ; v1(1013.23,247.11) R25.2
  Bottom Layer w10: v1(581.73,204.72) 970.84,204.72 v1(1013.23,247.11)
PC9: J2.38 R3.1 | length 621.7
  Top Layer w10: J2.38 766.22,236.22 825,295 825,500 958.5,633.5 R3.1
PC10: J2.3
PC11: J2.4
PC12: J2.5
PC13: J1.25
PC14: J1.24
PC15: J1.23
PD0: J2.6 U2.1 | length 849
  Top Layer w10: J2.6 944.21,-299.21 966,-321 U2.1
PD1: J2.7 U2.4 | length 925.8
  Top Layer w10: U2.4 816,-641 759.26,-584.26 759.26,-520.74 820,-460 820,-285 837.28,-267.72 J2.7
PD2: J2.8
PD3: IC2.15 J2.9 R23.1 | length 1838.9
  Top Layer w10: v1(-525,-745) -525,-750.28 -508.39,-766.9 IC2.15 ; v1(-265,-700) v1(95,-700) ; v1(815,-220) 820.28,-220 835.42,-204.86 889.86,-204.86 J2.9
  Bottom Layer w10: v1(-525,-745) -448.9,-745 v1(-405,-701.1) -401.95,-698.05 -268.05,-698.05 v1@-265,-695 ; v1(95,-700) 95,-655 527.5,-222.5 812.5,-222.5 v1(815,-220)
PD4: J2.10
PD5: J2.11
PD6: J2.12
PD7: J2.13
PD8: J2.56 J4.3 | length 1474.8
  Top Layer w10: v1(635,-330) 635.35,-330.35 704.61,-330.35 J2.56 ; v1(1015,-710) 1567,-1262 J4.3
  Bottom Layer w10: v1(635,-330) v1(1015,-710)
PD9: J2.55 J7.3 | length 1085.6
  Top Layer w10: J2.55 758.93,-299.21 774.72,-315 v1(780,-315) ; v1(1080,-315) 1394.92,-629.92 J7.3
  Bottom Layer w10: v1(780,-315) v1(1080,-315)
PD10: J2.54 J5.3 | length 1283.8
  Top Layer w10: J2.54 767,-267.72 774.72,-260 v1(780,-260)
  Bottom Layer w10: v1(780,-260) 940,-260 1639.85,439.85 1639.85,476.3 J5.3
PD11: J2.53 J6.3 | length 2887.9
  Top Layer w10: v1(75,-270) 95,-290 605,-290 658.78,-236.22 J2.53 ; v1(305,-40) 305,1171.14 J6.3
  Bottom Layer w10: v1(75,-270) 186.18,-158.82 186.18,-143.82 236.22,-93.78 251.22,-93.78 v1(305,-40)
PD12: J2.52 J3.2 | length 2112
  Top Layer w10: v1(600,-170) 634.72,-204.72 J2.52
  Bottom Layer w10: v1(600,-170) 645,-170 765,-50 915,-50 1480,515 1480,1098.46 J3.2
PD13: J2.51 J4.2 | length 1485.9
  Top Layer w10: J2.51 705.85,-174.11 779.11,-174.11 v1(780,-175) ; v1(970,-175) 1020,-225 1020,-478.46 J4.2
  Bottom Layer w10: v1(780,-175) v1(970,-175)
PD14: J2.50 J7.2 | length 1090.1
  Top Layer w10: J2.50 705.83,-140.87 819.13,-140.87 v1(820,-140) ; v1(1005,-140) 1344.92,-479.92 J7.2
  Bottom Layer w10: v1(820,-140) v1(1005,-140)
PD15: J2.49 J5.2 | length 1277.8
  Top Layer w10: J2.49 769.48,-110.24 774.72,-105 v1(780,-105)
  Bottom Layer w10: v1(780,-105) 940,-105 1638.51,593.51 1638.51,624.96 J5.2
PE0: J2.28
PE1: J2.29
PE2: C17.2 J1.30 SW2.1 | length 691.6
  Top Layer w10: SW2.1@-1328.39,598.78 -1165,598.78 -1064.37,598.78 -1053.15,610 C17.2 -915,610 -761.69,456.69 J1.30
PE3: C14.2 J1.29 SW1.1 | length 663.7
  Top Layer w10: SW1.1@-1328.39,522.32 -1165,522.32 -1064.37,522.32 -1053.15,511.1 -851.1,511.1 -765.2,425.2 J1.29
PE4: J1.28
PE5: J1.27
PE6: J1.26
PE7: J1.50
PE8: J1.51
PE9: J1.52
PE10: J1.53
PE11: J1.54
PE12: J1.55
PE13: J1.56
PE14: J1.57
PE15: J1.58
PF0: J1.22 R2.1 U1.12 | length 547.5
  Top Layer w10: J1.22 -624.72,204.72 -585,165 v1(-585,140) ; v1(-420,70) R2.1 -350.3,60.3 -246.52,60.3 U1.12
  Bottom Layer w10: v1(-585,140) -515,70 v1(-420,70)
PF1: J1.21 R1.1 U1.11 | length 582.2
  Top Layer w10: J1.21 -653.23,173.23 -625,145 v1(-625,95) ; v1(-420,-10) -365,-10 R1.1 -352.19,-7.19 -243.41,-7.19 U1.11
  Bottom Layer w10: v1(-625,95) -520,-10 v1(-420,-10)
PF2: J1.20 J16.2 | length 1560.4
  Top Layer w10: v1(-1495,725) v1(-1495,1100.71) ; v1(-775,145) -772.64,142.64 -705.87,142.64 J1.20
  Bottom Layer w10: J16.2 -1643.57,1106.57 -1500.86,1106.57 v1(-1495,1100.71) ; v1(-1495,725) -915,145 v1(-775,145)
PF3: J1.19 J17.2 | length 1153.5
  Top Layer w10: v1(-820,110) -819.88,110.12 -705.08,110.12 J1.19
  Bottom Layer w10: J17.2 -1485,625 -970,110 v1(-820,110)
PF4: J1.18 J18.2 | length 969.8
  Top Layer w10: v1(-775,75) -772.17,77.83 -705.87,77.83 J1.18
  Bottom Layer w10: J18.2 -1577,75 v1(-775,75)
PF5: J1.17 J19.2 | length 1100
  Top Layer w10: v1(-820,40) -755,40 -747.76,47.24 J1.17
  Bottom Layer w10: J19.2 -1199,-339 v1(-820,40)
PF6: J1.16
PF7: J1.15
PF8: J1.14
PF9: J1.13
PF10: J1.12
PF11: J1.43
PF12: J1.44
PF13: J1.45
PF14: J1.46
PF15: J1.47
PG0: J1.48
PG1: J1.49
PG2: J2.48
PG3: J2.47 J9.3 | length 1981.9
  Top Layer w10: v1(580,-65) 645,-65 662.76,-47.24 J2.47
  Bottom Layer w10: J9.3 -10,-1641.5 -10,-635 558.95,-66.05 578.95,-66.05 v1(580,-65)
PG4: J2.46 J9.2 | length 2001
  Top Layer w10: v1(620,-30) 625.28,-30 639.54,-15.75 J2.46
  Bottom Layer w10: J9.2 40,-1541.5 40,-650 620,-70 v1(620,-30)
PG5: J2.45 J10.3 | length 2327.4
  Top Layer w10: v1(425,-85) 525.75,15.75 J2.45
  Bottom Layer w10: J10.3 -100,-1122.91 -100,-610 v1(425,-85)
PG6: J2.44 J10.2 | length 2315.9
  Top Layer w10: v1(455,-5) 507.24,47.24 J2.44
  Bottom Layer w10: J10.2 -55,-1227.91 -55,-619.39 465,-99.39 465,-20.28 455,-10.28 v1(455,-5)
PG7: J2.43 J11.3 | length 2966.2
  Top Layer w10: v1(315,-85) 478.74,78.74 J2.43
  Bottom Layer w10: J11.3 -1248.5,-1653.5 -1020,-1425 -545,-1425 -190,-1070 -190,-590 v1(315,-85)
PG8: J2.42 J11.2 | length 2917.2
  Top Layer w10: v1(345,-5) 345,0 455.24,110.24 J2.42
  Bottom Layer w10: J11.2 -1112.5,-1642.5 -940,-1470 -520,-1470 -143.02,-1093.02 -143.02,-598.02 355,-100 355,-20.28 345,-10.28 v1(345,-5)
PG9: J2.14
PG10: J2.15
PG11: IC2.16 J2.16 | length 2153
  Top Layer w10: IC2.16 -528.07,-797.21 -565,-760.28 -565,-730 -520,-685 v1(-520,-380) ; v1(820,15) 820.37,15.37 889.63,15.37 J2.16
  Bottom Layer w10: v1(-520,-380) -520,-375 -115,30 804.38,30 819.38,15 v1(820,15)
PG12: J2.17
PG13: IC2.17 J2.18 | length 2199
  Top Layer w10: v1(-570,-380) -570,-695 -595,-720 -595,-765 -547.76,-812.24 IC2.17@-547.76,-899.03 ; v1(820,63) 825.28,63 841.02,78.74 J2.18
  Bottom Layer w10: v1(-570,-380) -127,63 v1(820,63)
PG14: IC2.18 J2.19 | length 2264.6
  Top Layer w10: v1(-620,-380) -620,-775 -567.44,-827.56 IC2.18 ; v1(820,110) 820.12,110.12 889.88,110.12 J2.19
  Bottom Layer w10: v1(-620,-380) -145,95 804.38,95 819.38,110 v1(820,110)
PG15: J2.20
RD_N: C23.2 IC2.22 R17.1 RJ1.6 | length 894.2
  Top Layer w10: RJ1.6 -1175,-1126.26 -1175,-1154.14 -1169.14,-1160 -1075,-1160 -1070,-1160 ccw(c-1070,-1147.5) -1057.5,-1147.5 -1057.5,-1146.85 cw(c-1045,-1146.85) -1032.5,-1146.85 -1032.5,-1149.28 ccw(c-1020,-1149.28) -1007.5,-1149.28 -1007.5,-1146.85 cw(c-995,-1146.85) -982.5,-1146.85 -982.5,-1147.5 ccw(c-970,-1147.5) -970,-1160 -923.8,-1160 -845,-1160 ; R17.1 -845,-1078.32 -845,-1160 ; C23.2@-769.08,-1077.2 C23.2 -772.23,-1129.63 -770.3,-1131.57 ; -743.15,-1103.14 -741.86,-1103.14 ; IC2.22 -595.08,-996.47 -614.39,-996.47 -615.77,-997.85 -636.57,-997.85 -741.86,-1103.14 ; -845,-1160 -798.73,-1160 -770.3,-1131.57 ; -770.3,-1131.57 -741.86,-1103.14
RD_P: C22.2 IC2.23 R16.1 RJ1.3 | length 978
  Top Layer w10: RJ1.3 -1235,-1016.26 -1235,-1145 -1204.29,-1175.71 -1164.08,-1175.71 -1163.01,-1176.78 -995,-1176.78 ; R16.1 -995,-1176.78 ; C22.2 -920,-1211.68 -920,-1176.78 ; IC2.23@-605.75,-1016 -614.39,-1016 -615.77,-1014.62 -629.62,-1014.62 -791.78,-1176.78 -920,-1176.78 ; -995,-1176.78 -920,-1176.78
RS232_RX: IC1.8 J8.3 | length 381.2
  Top Layer w10: IC1.8 -957.25,949.45 -957.25,1209.8 J8.3
RS232_TX: IC1.7 J8.2 | length 553.9
  Top Layer w10: J8.2 -995,1280.04 -995,895 -980,880 -910,880 -900,890 IC1.7
TD_N: C21.2 IC2.20 R15.1 RJ1.2 | length 829.5
  Top Layer w8: RJ1.2 -1194.17,-919.17 -1216.66,-941.66 -1216.66,-956.06 -1210.66,-962.05 -1209,-963.71 -1163.02,-963.71 -1157.87,-958.56 -1156.34,-957.02 -1104.21,-957.02 ccw(c-1104.21,-948.02) -1095.21,-948.02 -1095.21,-946.28 cw(c-1086.21,-946.28) -1077.21,-946.28 -1077.21,-954.71 ccw(c-1068.21,-954.71) -1059.21,-954.71 -1059.21,-942.46 cw(c-1050.21,-942.46) -1041.21,-942.46 -1041.21,-948.02 ccw(c-1032.21,-948.02) -1032.21,-957.02 -1010.21,-957.02 -995,-957.02 ; R15.1 -993.88,-955.91 -995,-957.02 ; C21.2 -920,-957.02 ; IC2.20 -920,-957.02 ; -995,-957.02 -920,-957.02
TD_P: C20.2 IC2.21 R14.1 RJ1.1 | length 832
  Top Layer w8: RJ1.1 -1231.31,-919.95 -1231.31,-935.31 -1229.66,-936.97 -1229.66,-961.44 -1216.05,-975.05 -1214.39,-976.71 -995,-976.71 ; R14.1 -993.88,-977.82 -995,-976.71 ; C20.2 -920,-976.71 ; IC2.21 -920,-976.71 ; -995,-976.71 -920,-976.71
VCC_3V3: IC2.9 J1.3 J1.4 | length 1205.8
  Top Layer w10: v1(-840,-615) -840,-774.72 -835,-779.72 v1(-835,-785) ; J1.3 -756.02,-393.7 -769.72,-380 v1(-775,-380) -758.11,-363.11 -705.87,-363.11 J1.4 ; IC2.9 -401.39,-996.39 v1(-380,-975)
  Bottom Layer w10: v1(-840,-615) -840,-430 -790,-380 v1(-775,-380) ; v1(-835,-785) -831.26,-788.74 -831.26,-798.74 -810,-820 -572.64,-820 -417.64,-975 v1(-380,-975)
VCC_3V3E: C24.2 C25.2 C26.2 IC2.1 IC2.19 IC3.2 R14.2 R15.2 R16.2 R17.2 RJ1.4 RJ1.5 | length 2903.8
  Top Layer w10: RJ1.4 -1100,-1101.26 -1083.74,-1101.26 v1(-1080,-1105) -1074.72,-1105 -1057.67,-1087.95 -1004.63,-1087.95 R14.2 ; v1(-1080,-1270) -1000,-1270 R16.2 ; R17.2 v1(-845,-1015) ; v1(-645,-925) -639.72,-925 -627.38,-937.34 IC2.19 ; v1(-620,-1090) -575,-1090 -567.44,-1082.44 IC2.1
  Top Layer w25: C24.2 -1374.45,-595.55 C24.2@-1370.55,-595.55 ; IC3.2 -1370.55,-555 ; v1(-995,-860) -993.88,-858.88 R15.2 -1116.57,-857.8 -1118.77,-860 v1(-1120,-860) -1285,-695 ; C24.2@-1370.55,-595.55 -1370.55,-555 ; C24.2@-1370.55,-595.55 -1350.27,-595.55 ; C24.2@-1370.55,-595.55 -1370.55,-609.45 -1285,-695 ; -1370.55,-555 -1330,-595.55 ; -1350.27,-595.55 -1330,-595.55 ; -1350.27,-595.55 -1350.27,-609.73 -1340,-620 ; -1340,-620 -1330,-620 -1317.77,-607.77 ; -1340,-620 -1329.72,-630.27 ; -1330,-595.55 -1329.45,-596.1 ; -1330,-595.55 -1285.55,-595.55 C26.2 ; -1329.72,-630.27 -1317.77,-642.23 ; -1329.72,-630.27 -1317.77,-630.27 ; -1329.45,-596.1 -1317.77,-607.77 ; -1329.45,-596.1 C26.2 ; -1317.77,-642.23 -1317.77,-630.27 ; -1317.77,-642.23 -1308.89,-651.11 ; -1317.77,-630.27 -1317.77,-607.77 ; -1317.77,-630.27 -1295.27,-630.27 ; -1317.77,-607.77 -1295.27,-630.27 ; -1308.89,-651.11 -1308.89,-643.89 -1295.27,-630.27 ; -1308.89,-651.11 -1300,-660 -1285,-660 ; -1308.89,-651.11 -1296.11,-651.11 -1285,-640 ; -1295.27,-630.27 -1285.55,-640 -1285,-640 ; -1285,-695 -1285,-660 ; -1285,-660 -1285,-640 ; -1285,-640 C26.2
  Bottom Layer w10: v1(-1080,-1270) v1(-1080,-1105) ; -852.5,-860 -845,-867.5 v1(-845,-1015) ; v1(-645,-925) -645,-1062.3 v1@-620,-1087.3
  Bottom Layer w15: v1(-620,-1090) v1@-620,-1087.3
  Bottom Layer w25: RJ1.5 -1276.58,-1069.17 -1232.69,-1025.28 -1188.2,-1025.28 RJ1.4 -1120,-957.09 v1(-1120,-860) ; v1(-995,-860) -852.5,-860 -710,-860 v1(-645,-925)
VCC_5V: C1.1 C2.1 C3.2 C10.2 C13.2 C15.2 C16.2 C18.2 C19.2 IC1.16 IC3.3 J1.1 J1.2 J3.4 J4.4 J5.4 J6.4 J7.4 J9.4 J10.4 J11.4 P2.1 P2.2 P2.3 P2.4 R1.2 R2.2 U1.1 U2.3 U3.3 | length 16013.5
  Top Layer w10: C3.2@-520.7,729.6 C3.2 ; C1.1@397.9,-150 C1.1
  Top Layer w15: IC1.16 -600,724.19 -594.7,718.9 C3.2 -509.45,719.45 -440.55,719.45 v1(-440,720) ; v1(-420,-65) -416.07,-65 -403.86,-77.2 R1.2 -360,-130 -250,-240 -250,-350 v1(-145,-455) ; R2.2 v1(-360,190) ; C1.1@397.9,-150 450,-150 542.22,-242.22 542.22,-252.22 v1(545,-255) ; v1(527.42,-924.88) 527.47,-924.93 C10.2@527.47,-980.32 ; C10.2@527.65,-980.25 C10.2 534,-986.6 U3.3 ; v1(859.42,-924.88) 859.47,-924.93 C13.2@859.47,-980.32 ; C13.2@859.65,-980.25 C13.2 866,-986.6 U2.3
  Top Layer w20: U1.1 C1.1@397.9,-150
  Top Layer w25: IC3.3@-1280,-438.86 -1270.85,-448.01 -1231.99,-448.01 -1213.78,-466.22 ; -1179.39,-500.61 -1179.39,-515 ; v1(-780,-440) -780,-465 -848.9,-533.9 -1030.29,-533.9 ; v1@-759.18,-470.82 -745.05,-456.69 J1.1 ; -1213.78,-466.22 -1187.5,-492.5 -1170,-492.5 ; -1213.78,-466.22 C18.2 C18.2@-1171.85,-466.22 ; -1179.39,-515 -1060,-515 -1054.59,-509.59 ; -1179.39,-515 -1179.39,-530.65 -1176.14,-533.9 C19.2 C15.2 -1030.29,-533.9 ; C18.2@-1171.85,-466.22 C16.2@-1104.27,-466.22 ; C18.2@-1171.85,-466.22 C18.2@-1157.78,-480.28 ; -1170,-492.5 C18.2@-1157.78,-480.28 ; -1170,-492.5 -1145.57,-492.5 ; C18.2@-1157.78,-480.28 -1146.97,-469.47 -1135.46,-480.98 C16.2@-1119.02,-480.98 ; C18.2@-1157.78,-480.28 -1145.57,-492.5 ; -1145.57,-492.5 -1130.55,-492.5 ; -1130.55,-492.5 C16.2@-1119.02,-480.98 ; -1130.55,-492.5 -1077.5,-492.5 -1074.59,-489.59 ; C16.2@-1119.02,-480.98 C16.2@-1104.27,-466.22 ; C16.2@-1104.27,-466.22 C16.2 -1097.97,-466.22 -1074.59,-489.59 ; -1074.59,-489.59 -1054.59,-509.59 ; -1054.59,-509.59 -1030.29,-533.9
  Top Layer w70: J11.4 -1408.94,-1649.94 -1408.94,-1573.94 -1280,-1445 -648.09,-1445 ; J10.4@-777.03,-1649.94 -777.03,-1573.94 -648.09,-1445 ; -775,-455 J1.1@-685,-455 ; v1(-240,-455) v1(-195,-455) v1(-145,-455) 50.16,-455 v1(240,-644.84) v1(310,-714.84) v1(345,-749.84) ; J9.4 -148,-1445 ; v1@276.69,-878.31 v1(240,-915) v1(205,-950) v1(170,-985) -148,-1303 ; -648.09,-1445 -290,-1445 ; -290,-1445 -220,-1445 ; -290,-1445 -148,-1303 ; -220,-1445 -148,-1445 ; -220,-1445 -220,-1427 -148,-1355 ; -148,-1445 -148,-1355 ; -148,-1355 -148,-1303
  Bottom Layer w15: v1(-440,720) -360,640 v1(-360,190) -360,-45 -380,-65 v1(-420,-65) ; v1(527.42,-924.88) 527.42,-870.5 618,-779.92 ; 527.42,-782.5 530,-779.92 ; v1(545,-255) 545,-390 934.92,-779.92 ; v1(859.42,-924.88) 859.42,-870.5 950,-779.92 ; 859.42,-785.5 865,-779.92
  Bottom Layer w70: -775,-455 v1(-240,-455) v1(-195,-455) v1(-145,-455) ; v1(170,-985) v1(205,-950) v1(240,-915) ; v1@245,-650 245.16,-650 v1(310,-714.84) v1(345,-749.84) 375.08,-779.92 ; 310,-845 v1(240,-915) ; J6.4 942.43,1653.54 975.97,1620 1795,1620 1840,1575 1840,922.08 ; J4.4 1790.08,-1412 1840,-1362.08 1840,-730 ; J5.4 1790.08,340 1840,290.08 ; J3.4 1790.08,972 1840,922.08 ; v1(240,-915) 375.08,-779.92 ; 375.08,-779.92 530,-779.92 618,-779.92 865,-779.92 934.92,-779.92 950,-779.92 J7.4 1790.08,-779.92 1840,-730 ; 1840,-730 1840,-210 ; 1840,-210 1840,210 ; 1840,-210 P2.4 P2.3 P2.2 P2.1 1840,210 ; 1840,210 1840,290.08 ; 1840,290.08 1840,922.08
  other v1: 276.29,-877.91 277.09,-681.13 -760,-470 -720,-470 -675,-470 -740,-440 -700,-440
VCC_12V: BUZZER1.1 J16.1 J17.1 J18.1 J19.1 P1.1 P1.2 P1.3 P1.4 | length 5886.5
  Bottom Layer w20: 0,1245 126,1119 BUZZER1.1
  Bottom Layer w70: J19.1@-1645.56,-488.44 -1775.56,-488.44 -1855,-409 -1855,73 ; J18.1@-1645.56,-6.44 -1775.56,-6.44 -1855,73 ; J17.1 -1645.56,475.56 -1775.56,475.56 -1855,555 ; P1.4 P1.3 0,1780 ; P1.1 P1.2 0,1780 ; -1855,73 -1855,555 ; -1855,555 -1855,875 -1775.56,954.44 -1648.56,954.44 J16.1 -287,958 0,1245 0,1780
pads on no net: IC1.11 IC1.12 IC1.13 IC1.14 IC2.6 IC2.10 IC3.4 J8.1 J8.4 J8.6 J8.7 J8.8 J8.9 U1.2 U1.3 U1.4 U1.5 U1.6 U1.9 U1.10 U1.13 U1.14 U2.5 U3.5

## Polygon pours and split planes (outlines as drawn)
GND on Top Layer "NONET_L01_P-001" (solid, shelved, pour order 0): 1968.5,-1811.02 cw(c1811.02,-1811.02) 1811.02,-1968.5 -1811.02,-1968.5 cw(c-1811.02,-1811.02) -1968.5,-1811.02 -1968.5,1811.02 cw(c-1811.02,1811.02) -1811.02,1968.5 1811.02,1968.5 cw(c1811.02,1811.02) 1968.5,1811.02
GND on Bottom Layer "NONET_L01_P-001" (solid, shelved, pour order 1): 1968.5,-1811.02 cw(c1811.02,-1811.02) 1811.02,-1968.5 -1811.02,-1968.5 cw(c-1811.02,-1811.02) -1968.5,-1811.02 -1968.5,1811.02 cw(c-1811.02,1811.02) -1811.02,1968.5 1811.02,1968.5 cw(c1811.02,1811.02) 1968.5,1811.02

## Silkscreen, mask and mechanical layers (free items; w line width, h text height)
Top Overlay:
  lines w10: 393.08,-1593.5 393.08,-1316.08 ; 724.92,-1593.5 724.92,-1316.08 ; 1056.92,-1593.5 1056.92,-1316.08
  lines w20: -940,-752.2 -940,-225 -940,517.2 cw(c-802.2,517.2) -802.2,655 802.2,655 cw(c802.2,517.2) 940,517.2 940,-752.2 cw(c802.2,-752.2) 802.2,-890 -275,-890 ; -270,1720 cw(c-149.29,1720) -234.64,1805.36 -106.85,1933.15 cw(c-21.5,1847.79) -21.5,1968.5 1811.02,1968.5 cw(c1811.02,1811.02) 1968.5,1811.02 1968.5,-1811.02 cw(c1811.02,-1811.02) 1811.02,-1968.5 -1811.02,-1968.5 cw(c-1811.02,-1811.02) -1968.5,-1811.02 -1968.5,1811.02 cw(c-1811.02,1811.02) -1811.02,1968.5 -1738.5,1968.5 cw(c-1738.5,1847.79) -1653.15,1933.15 -1525.36,1805.36 cw(c-1610.71,1720) -1490,1720 -274.53,1720 -270,1715.47 -270,1574.8 395,1574.8 395,1964.86 391.36,1968.5 330,1968.5 ; 1141.73,-1968.5 1141.73,-1574.8 1614.17,-1574.8 1614.17,-1968.5 ; 1141.73,1968.5 1141.73,1574.8 1614.17,1574.8 1614.17,1968.5 ; 1968.5,-236.22 1574.8,-236.22 1574.8,236.22 1968.5,236.22
  text "GND" at 1484.58,1929.75 h80 r180
  text "12V/2.5A" at 378.26,1917.49 h65 r180
  text "OUTPUT" at 395,1692.91 h120 r180
  text "OUTPUT" at 1614.17,1692.91 h120 r180
  text "5V/3A" at 1929.75,-186.61 h80 r90
  text "OUTPUT" at 1692.91,-236.22 h120 r90
  text "OUTPUT" at 1141.73,-1692.91 h120
  text "GND" at 1271.32,-1929.75 h80
Bottom Overlay:
  lines w20: -1958.7,-92 -1440,-92 ; -1958.7,390 -1440,390 ; -1958.7,872 -1440,872 ; -1958.7,1355 -1440,1355 ; -1956.46,-581.4 -1437.76,-581.4 -1437.76,-92 ; -1956.46,-99.4 -1437.76,-99.4 -1437.76,390 ; -1956.46,382.6 -1437.76,382.6 -1437.76,872 ; -1956.46,865.6 -1437.76,865.6 -1437.76,1355 ; -1736.46,-581.4 -1736.46,-97 ; -1736.46,-99.4 -1736.46,385 ; -1736.46,382.6 -1736.46,867 ; -1736.46,865.6 -1736.46,1350 ; -1505.1,-1964.96 -1505.1,-1446.26 -870.1,-1446.26 -870.1,-1964.96 ; -1505.1,-1744.96 -870.1,-1744.96 ; -939.88,605 949.88,605 ; -873.18,-1964.96 -873.18,-1446.26 -238.18,-1446.26 -238.18,-1964.96 ; -873.18,-1744.96 -238.18,-1744.96 ; -274.53,1720 -1490,1720 ccw(c-1610.71,1720) -1525.36,1805.36 -1653.15,1933.15 ccw(c-1738.5,1847.79) -1738.5,1968.5 -1811.02,1968.5 ccw(c-1811.02,1811.02) -1968.5,1811.02 -1968.5,-1811.02 ccw(c-1811.02,-1811.02) -1811.02,-1968.5 1811.02,-1968.5 ccw(c1811.02,-1811.02) 1968.5,-1811.02 1968.5,1811.02 ccw(c1811.02,1811.02) 1811.02,1968.5 -21.5,1968.5 ccw(c-21.5,1847.79) -106.85,1933.15 -234.64,1805.36 ccw(c-149.29,1720) -270,1720 ; -240.6,-1964.96 -240.6,-1446.26 394.4,-1446.26 394.4,-1964.96 ; -240.6,-1744.96 394.4,-1744.96 ; 391.4,-1964.96 391.4,-1446.26 1060,-1446.26 1060,-1964.96 ; 391.4,-1744.96 1060,-1744.96 ; 395,1745 1030,1745 ; 395,1965 395,1446.3 1030,1446.3 1030,1965 ; 725,-1965 ccw(c723.31,-1963.31) 725.7,-1963.31 725.7,-1446.26 ; 1745,-1504.6 1745,-869.6 ; 1745,-872.52 1745,-237.52 ; 1745,247.4 1745,882.4 ; 1745,879.4 1745,1514.4 ; 1965,-1504.6 1446.3,-1504.6 1446.3,-869.6 1965,-869.6 ; 1965,-872.52 1446.3,-872.52 1446.3,-237.52 1965,-237.52 ; 1965,247.4 1446.3,247.4 1446.3,882.4 1965,882.4 ; 1965,879.4 1446.3,879.4 1446.3,1514.4 1965,1514.4 ; -1018.62,418.78 ccw(c-968.62,418.78) -968.62,368.78 978.62,368.78 ccw(c978.62,418.78) 1028.62,418.78 1028.62,791.22 ccw(c978.62,791.22) 978.62,841.22 -968.62,841.22 ccw(c-968.62,791.22) -1018.62,791.22 -1018.62,723.11 -1018.62,418.78
  text "A13 D11" at 470.08,1894.99 h80 r180
  text "UR5" at 395,1564.41 h120 r180
  text "UR4" at 1564.41,1514.4 h120 r90
  text "D12 B15" at 1894.99,1452.65 h80 r90
  text "F2" at -1889.99,1038.35 h80 r270
  text "UR3" at 1564.41,882.4 h120 r90
  text "IR1" at -1555.87,865.6 h120 r270
  text "D15 D10" at 1894.99,820.65 h80 r90
  text "RobotCtrl_Base_Func" at 913.04,681.46 h100
  text "F3" at -1889.99,555.35 h80 r270
  text "V0.1 BETA" at -83.58,401.57 h120
  text "IR2" at -1555.87,382.6 h120 r270
  text "by Power Lin" at 949.88,367.09 h150
  text "F4" at -1889.99,73.35 h80 r270
  text "IR3" at -1555.87,-99.4 h120 r270
  text "UR2" at 1564.41,-237.52 h120 r90
  text "D14 D9" at 1894.99,-332.59 h80 r90
  text "F5" at -1889.99,-408.65 h80 r270
  text "IR4" at -1555.87,-581.4 h120 r270
  text "UR1" at 1564.41,-869.6 h120 r90
  text "D13 D8" at 1894.99,-964.67 h80 r90
  text "GPIO3" at -870.1,-1564.37 h120
  text "GPIO2" at -238.18,-1564.37 h120
  text "GPIO1" at 394.4,-1564.37 h120
  text "CAN1" at 725,-1564.37 h120
  text "CAN2" at 1060,-1564.37 h120
  text "G8 G7" at -998.49,-1894.94 h80
  text "G6 G5" at -366.58,-1894.94 h80
  text "G4 G3" at 266.01,-1894.94 h80
  text "P N" at 666.63,-1894.99 h80
  text "P N" at 996.63,-1894.99 h80
Mechanical 1:
  the board outline again, w10

## Text inside footprints (layer, text, board x,y; h text height)
U1: Top Overlay "SWC" at -97.18,-85.98 h39.37 r180; Top Overlay "TX" at -97.18,167.82 h39.37 r180; Top Overlay "RX" at -97.18,114.02 h39.37 r180; Top Overlay "SDA" at -97.18,64.02 h39.37 r180; Top Overlay "SCL" at -97.18,14.02 h39.37 r180; Top Overlay "SWD" at -97.18,-35.98 h39.37 r180; Top Overlay "GND" at -97.18,-135.98 h39.37 r180; Top Overlay "D5" at 179.62,165.42 h39.37 r180; Top Overlay "D4" at 179.62,115.42 h39.37 r180; Top Overlay "D3" at 179.62,65.42 h39.37 r180; Top Overlay "D2" at 179.62,15.42 h39.37 r180; Top Overlay "D1" at 179.62,-34.58 h39.37 r180; Top Overlay "D0" at 179.62,-84.58 h39.37 r180; Top Overlay "VCC" at 179.62,-134.58 h39.37 r180